# Altium PCB PCB1.PcbDoc
Units mm, origin at the board's own origin, x right, y up, seen from the top; angles counter-clockwise.
Board outline 28.19 x 24.38 mm, 2 copper layers (Top Layer, Bottom Layer), stack 1.571 mm thick; 10 components, 10 nets, 46 pads, 0 vias.
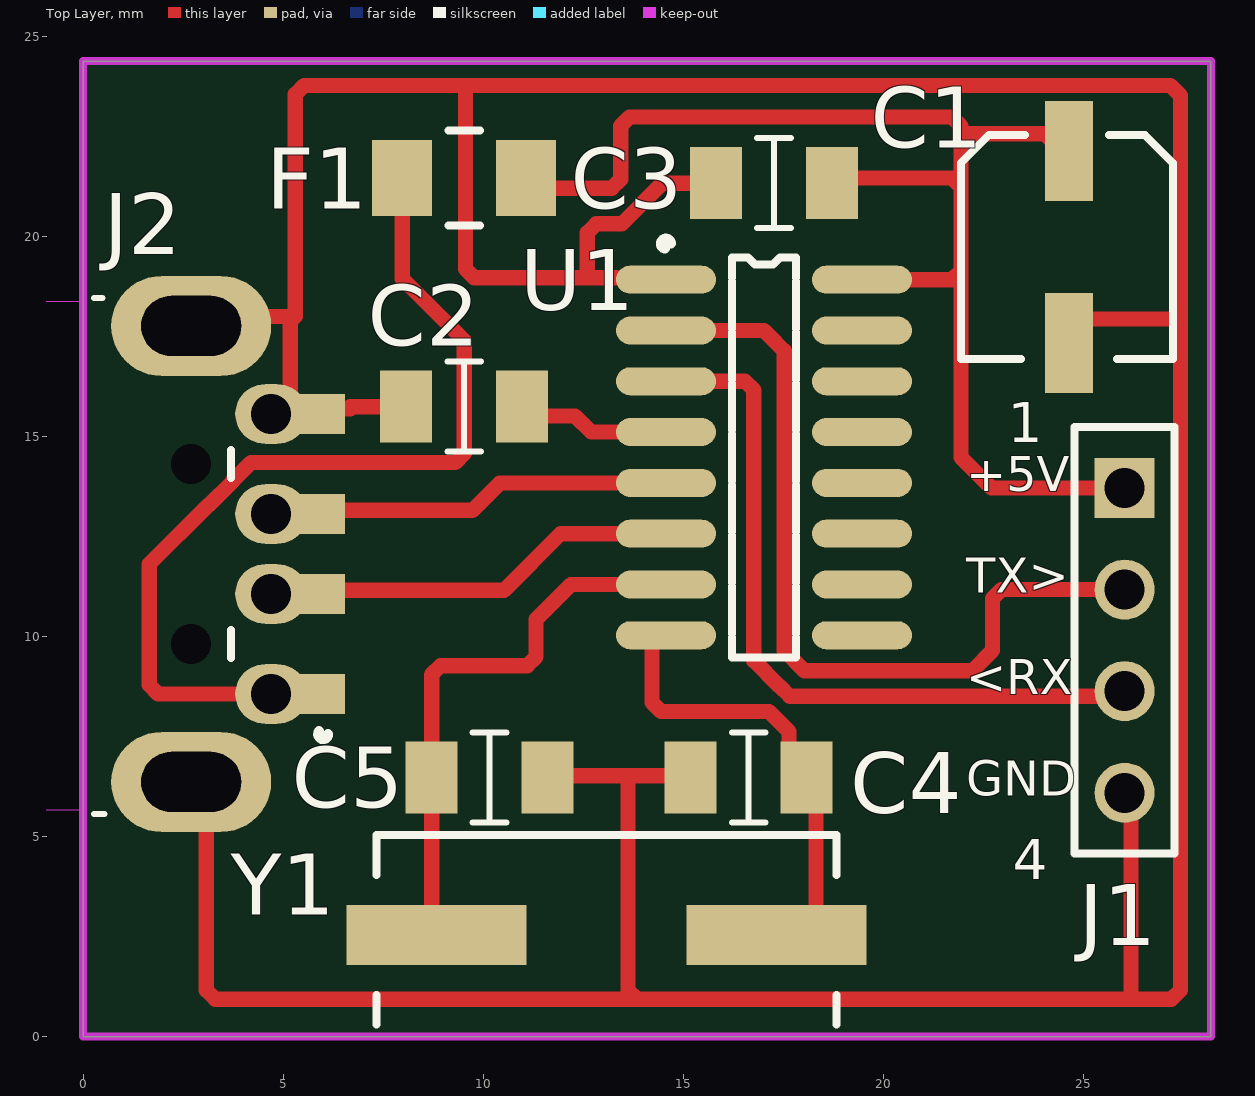
[diagram p0: Top Layer view]
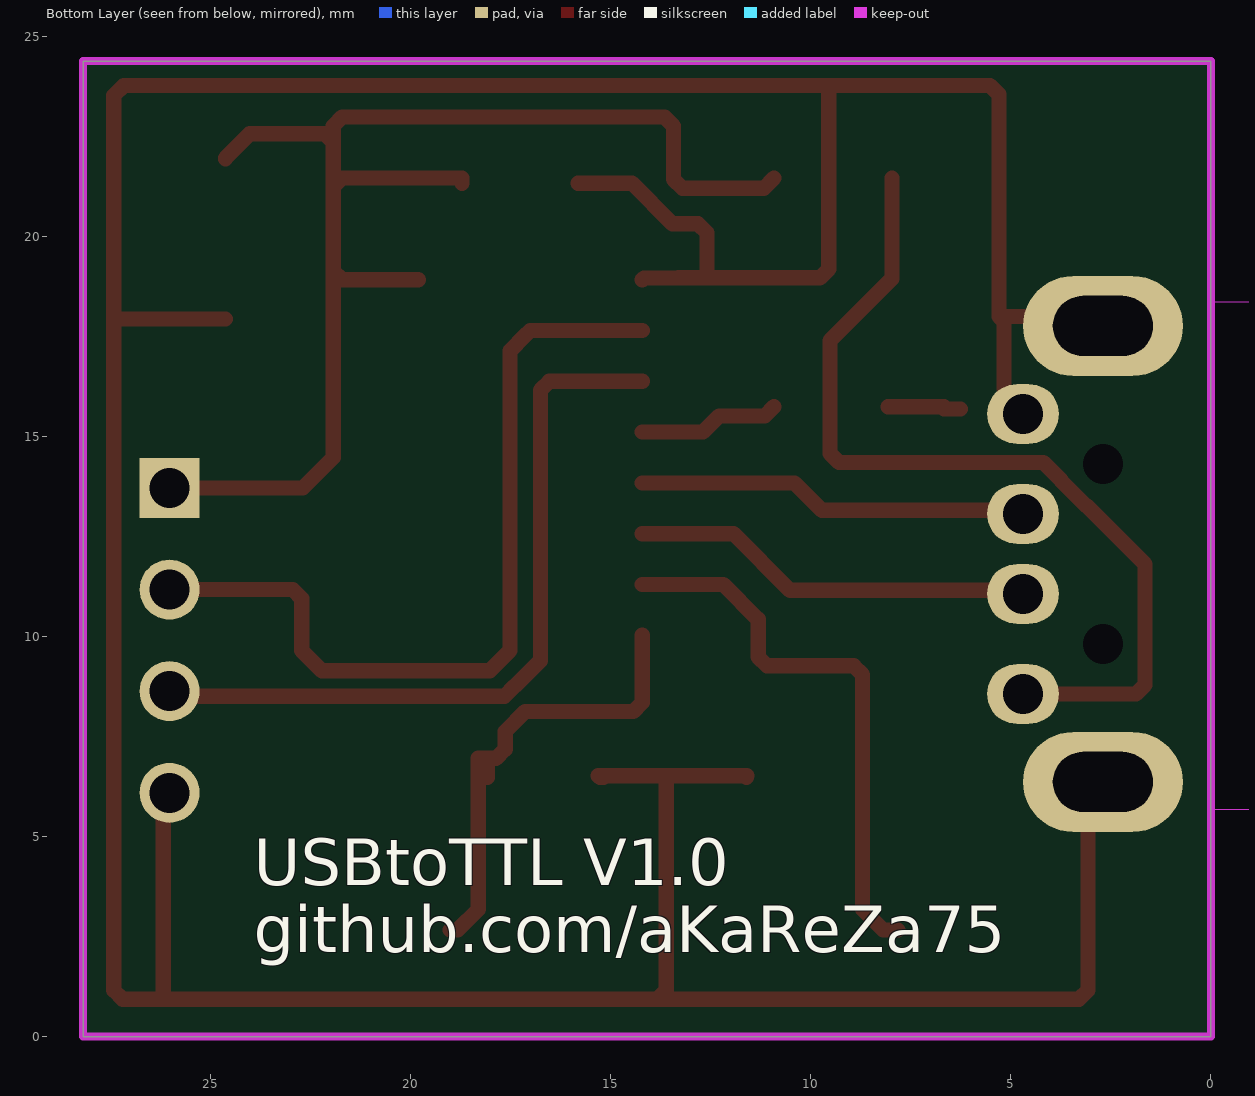
[diagram p1: Bottom Layer view, seen from below]

## Layer stack, top to bottom
Top Solder: solder mask 0.0102, Solder Resist, Dk 3.5
Top Layer: signal copper 0.0356
Dielectric 1: dielectric 1.5, FR-4, Dk 4.8
Bottom Layer: signal copper 0.0356
Bottom Solder: solder mask 0.0102, Solder Resist, Dk 3.5

## Board outline
0,0 28.194,0 28.194,24.384 0,24.384

## Design rules (kind name [scope] priority, off if disabled: settings)
AcuteAngle [All] p1: minimum=6.00000000000000E+0001 checktracksonly=TRUE
AssemblyTestPointUsage [All] p1 off:
AssemblyTestpoint [All] p1 off: testpointundercomponent=TRUE minsize=1.016 maxsize=2.54 preferedsize=1.524 minholesize=0 maxholesize=1.016 preferedholesize=0.813 testpointgrid=0.025 usegrid=TRUE gridtolerance=0 allowsidetop=TRUE allowsidebottom=TRUE
BoardOutlineClearance [All] p1: gap=0.2 ignorepadtopadclearanceinfootprint=FALSE
Clearance Poly_Clearance [All vs InPolygon] p1: gap=0.25 ignorepadtopadclearanceinfootprint=TRUE except(0.3: Arc-Hole Track-Hole SMDPad-Hole THPad-Hole Via-Hole Fill-Hole Poly-Hole Region-Hole Text-Hole)
Clearance [All] p2: gap=0.2 ignorepadtopadclearanceinfootprint=FALSE except(0.3: Arc-Hole Track-Hole SMDPad-Hole THPad-Hole Via-Hole Fill-Hole Poly-Hole Region-Hole Text-Hole)
FabricationTestPointUsage [All] p1 off: valid=0 allowmultiple=FALSE
FabricationTestpoint [All] p1 off: side=3 testpointundercomponent=TRUE minsize=1.016 maxsize=2.54 preferedsize=1.524 minholesize=0 maxholesize=1.016 preferedholesize=0.813 testpointgrid=0.025 allowsidetop=TRUE allowsidebottom=TRUE usegrid=TRUE gridtolerance=0
HoleSize [All] p1: absolutevalues=TRUE maxlimit=10 minlimit=0.4 maxpercent=80.000 minpercent=20.000
HoleToHoleClearance [All] p1: gap=0.3 allowstackedmicrovias=TRUE
MinimumAnnularRing [All] p1: minimumring=0.15
MinimumSolderMaskSliver [All] p1: minsoldermaskwidth=0.01
PolygonConnect [All] p1: thpad.connectstyle=Relief thpad.reliefconductorwidth=0.4 thpad.reliefentries=4 thpad.polygonreliefangle="90 Angle" thpad.airgapwidth=0.4 smdpad.connectstyle=Relief smdpad.reliefconductorwidth=0.4 smdpad.reliefentries=4 smdpad.polygonreliefangle="90 Angle" smdpad.airgapwidth=0.4 via.connectstyle=Direct via.reliefconductorwidth=0.254 via.reliefentries=4 via.polygonreliefangle="90 Angle" via.airgapwidth=0.254
RoutingVias [All] p1: holewidth=0.4 width=0.7 viastyle="Through Hole" minholewidth=0.4 minwidth=0.7 maxholewidth=3 maxwidth=6
SilkToSilkClearance [All] p1: silktosilkclearance=0
SilkToSolderMaskClearance [IsPad] p1: minsilkscreentomaskgap=0.01 clearancetoexposedcopper=TRUE
SolderMaskExpansion [All] p1: expansion=0.102 istentingtop=FALSE
Width [All] p1: maxlimit=10 minlimit=0.2 preferedwidth=0.3
21 further rules are at their usual default settings.

## Components (designator, comment, footprint, x,y, rotation, side; value= is the part's Value field where it differs from the comment)
C1 "10u" "CAP ALUM 5MM" 24.638,19.939 r270 top
C2 "10n" "CAP 1206/3216" 9.525,15.748 r180 top
C3 "100n" "CAP 1206/3216" 17.272,21.336 r180 top
C4 "22p" "CAP 1206/3216" 16.637,6.477 r180 top
C5 "22p" "CAP 1206/3216" 10.16,6.477 r0 top
F1 "100m" 1206_F 9.525,21.463 r0 top
J1 "4" HDR_THT_4F_2.54mm 26.035,9.906 r270 top
J2 "Type A" "USB A TYPE Right Angle" 0,12.065 r180 top
U1 "CH340G" SO16_M 17.018,14.478 r0 top
Y1 "12M" "Crystal SMD" 13.081,2.54 r180 top

## Footprints (in the part's own frame and the unit in brackets; to place one, negate y for a bottom-side part, rotate by r counter-clockwise, add the part's x,y. Pads: shape width x height; smd on the part's side, far side on the other; paste and mask are expansions set on the pad)
1206_F [mm] "Surface mount FUSE 1206"
  rect 1.5x1.9 smd: 1(-1.55,0) 2(1.55,0)
  silkscreen extent -0.4,-1.18 0.4,1.18, body extent -2.46,-1.28 2.46,1.28, height 0.71
"CAP 1206/3216" [mm] "Chip Capacitor, 2-Leads, Body 3.25x1.60mm, IPC Medium Density"
  rect 1.3x1.8 smd: 1(-1.45,0) 2(1.45,0)
  silkscreen extent -0.42,-1.12 0.42,1.12, body extent -2.37,-1.2 2.38,1.2, height 1.6
"CAP ALUM 5MM" [mm] "Aluminum Electrolytic Capacitor, Body 6.60x6.60x7.70mm, IPC Low Density"
  rect 2.5x1.2 smd: 1(-2.2,0) 2(2.6,0)
  silkscreen extent -2.6,-2.7 3,2.6, body extent -5.32,-3.92 5.33,3.93, height 7.7
"Crystal SMD" [mm] "DESIGNER ABBAS BASEREH"
  rect 4.5x1.5 smd: 1(-4.25,0) 2(4.25,0)
  silkscreen extent -5.75,-2.5 5.75,2.24, body extent -6.9,-2.8 6.9,2.8, height 4
HDR_THT_4F_2.54mm [mm] "Socket Header, Pitch 2.54 mm, THT, Vertical, single row, 4p"
  rect 1.5x1.5 hole 1: 1(-3.81,0)
  round 1.5 hole 1: 2(-1.27,0) 3(1.27,0) 4(3.81,0)
  silkscreen extent -5.33,-1.25 5.33,1.25, body extent -5.58,-1.5 5.58,1.5, height 8.5
SO16_M [mm] "16-Pin Small Outline Integrated Circuit 1.27 mm Pitch, IPC Low Density - DESIGNER ABBAS BASEREH"
  oval 2.5x0.7 smd: 1(-2.45,4.445) 2(-2.45,3.175) 3(-2.45,1.905) 4(-2.45,0.635) 5(-2.45,-0.635) 6(-2.45,-1.905) 7(-2.45,-3.175) 8(-2.45,-4.445) 9(2.45,-4.445) 10(2.45,-3.175) 11(2.45,-1.905) 12(2.45,-0.635) 13(2.45,0.635) 14(2.45,1.905) 15(2.45,3.175) 16(2.45,4.445)
  silkscreen extent -2.57,-5 0.8,5.47, body extent -4.25,-5.55 4.25,5.6, height 1.75
"USB A TYPE Right Angle" [mm] "Connector; USB1.1, Type A, SM; 4 Position; Right Angle DESIGNER ABBAS BASEREH"
  rect 2.5x1 smd: 1(-5.3,3.5) 2(-5.3,1) 3(-5.3,-1) 4(-5.3,-3.5)
  oval 1.8x1.5 hole 1: 1(-4.7,3.5) 2(-4.7,1) 3(-4.7,-1) 4(-4.7,-3.5)
  oval 4x2.5 hole 1.5 slot 2.5 at 0 deg: 5(-2.7,-5.7) 6(-2.7,5.7)
  round 0.8 hole 1 unplated: MH1(-2.7,-2.25) MH2(-2.7,2.25)
  Keep-Out Layer board cut-out: 0,6.4 0,-6.3 15.3,-6.3 15.3,6.4
  silkscreen extent -6.13,-6.4 -0.28,6.5, body extent -7.1,-7.1 15.6,7.1, height 4.5

## Part data
C1: library part Cap_Elec_10u_25_SMD, "Electrolit Capacitor SMD", Package=Package?, Rating=6.3V, Inflow=5220, Type=Electrolit, Validation=Valid
C2 C4 C5: library part Cap_Multi_SMD_1206, "Bipolar ceramic capacitor SMD", Package=1206, Rating=Rating?, Inflow=inflow?, Type=MultiLayer, Validation=Valid
C3: library part Cap_Multi_SMD_100nF_1206, "Bipolar ceramic capacitor SMD", Package=1206, Rating=50V, Inflow=inflow?, Type=MultiLayer, Validation=Valid
F1: library part Other_Elec_Fuse_SMD, "Short circiut  protection", Package=1206, Rating=Rating?, Inflow=inflow?, Type=Fast, Validation=Valid
J1: library part Con_FPH_4x1_V_THT_2.54, "Header, single row, 4 pin", Package=Package?, Rating=Rating?, Inflow=8101, Type=Type?, Validation=NT
J2: library part Con_USB2_A, "USB Connector-A Type", Package=Package?, Rating=Rating?, Inflow=6160, Type=Type?, Validation=NT
U1: library part IC_Converter_CH340G, "TTL To USB Chip", Package=SO-16, Rating=Rating?, Inflow=inflow?, Type="USB to TTL", Validation=Valid
Y1: library part Other_Elec_Xtal_SMD, "Crystal Oscillator", Package=SMD, Rating=Rating?, Inflow=inflow?, Type=Quartz, Validation=Valid

## Nets (pads, with @x,y where several pads share a name; then routed paths per layer and width w, separated by ;. In a path a pad name is that pad's centre, name@x,y a point inside that pad or via, vN(x,y) a via of type N, cw(c..) or ccw(c..) an arc to the next point about the centre after c; other vN are vias at no path point)
+5: C1.1 C3.1 F1.2 J1.1 U1.16 | length 34.1
  Top Layer w0.381: F1.2@10.925,21.463 11.179,21.209 13.212,21.209 13.435,21.432 13.435,22.764 13.658,22.987 21.721,22.987 21.944,22.764 21.944,22.351 ; C3.1 18.722,21.463 21.721,21.463 21.944,21.24 ; U1.16@19.818,18.923 21.721,18.923 21.944,19.146 ; C1.1@24.638,21.939 24.638,21.965 24.028,22.574 22.167,22.574 21.944,22.351 ; J1.1 22.706,13.716 21.944,14.478 21.944,19.146 ; 21.944,19.146 21.944,21.24 ; 21.944,21.24 21.944,22.351
GND: C1.2 C2.2 C3.2 C4.2 C5.2 J1.4 J2.4 J2.5 J2.6 U1.1 | length 119.2
  Top Layer w0.381: J2.6 3.078,5.987 3.078,1.158 3.301,0.935 13.844,0.935 ; J2.5 2.935,18 5.3,18 ; J2.4@5.3,15.565 5.064,15.801 5.064,16.082 5.176,16.193 5.176,17.876 5.3,18 ; J2.4@6.265,15.692 6.674,15.692 6.674,15.748 C2.2 ; C5.2 11.61,6.519 11.606,6.523 13.621,6.523 ; U1.1@14.218,18.923 14.176,18.965 13.321,18.965 13.317,18.969 12.603,18.969 ; C4.2 15.275,6.477 15.321,6.523 13.621,6.523 ; C3.2 14.478,21.336 13.462,20.32 12.826,20.32 12.603,20.097 12.603,18.969 ; C1.2@24.638,17.939 27.432,17.939 ; J1.4 26.192,5.939 26.192,0.935 ; 5.3,18 5.3,23.556 5.523,23.78 9.586,23.78 ; 9.586,23.78 9.555,23.749 9.555,19.192 9.778,18.969 12.603,18.969 ; 9.586,23.78 27.178,23.78 27.432,23.526 27.432,17.939 ; 13.621,6.523 13.621,1.158 13.844,0.935 ; 13.844,0.935 26.192,0.935 ; 26.192,0.935 27.209,0.935 27.432,1.158 27.432,17.939
NetC2_1: C2.1 U1.4 | length 3.6
  Top Layer w0.381: C2.1@10.925,15.748 11.157,15.516 12.297,15.516 12.7,15.113 U1.4@14.218,15.113
NetC4_1: C4.1 U1.8 Y1.1 | length 11.8
  Top Layer w0.381: U1.8@14.218,10.033 14.218,8.351 14.441,8.128 17.145,8.128 17.643,7.63 17.643,7.187 17.873,6.956 C4.1@18.087,6.956 ; C4.1 C4.1@18.087,6.956 ; Y1.1@19.024,2.667 18.833,2.667 18.317,3.184 18.317,6.956 C4.1@18.087,6.956
NetC5_1: C5.1 U1.7 Y1.2 | length 14
  Top Layer w0.381: Y1.2@7.824,2.667 8.193,2.667 8.71,3.184 C5.1 8.71,9.048 8.933,9.271 11.098,9.271 11.321,9.494 11.321,10.432 12.192,11.303 U1.7@14.218,11.303
NetF1_1: F1.1 J2.1 | length 22.7
  Top Layer w0.381: J2.1@4.7,8.565 1.874,8.565 1.651,8.788 1.651,11.811 3.114,13.274 3.131,13.274 3.741,13.884 3.741,13.901 4.191,14.351 9.302,14.351 9.525,14.574 9.525,17.399 7.975,18.949 F1.1
NetJ2_2: J2.2 U1.6 | length 10.1
  Top Layer w0.381: J2.2@4.7,11.065 4.791,11.156 10.521,11.156 11.938,12.573 U1.6@14.218,12.573
NetJ2_3: J2.3 U1.5 | length 9.8
  Top Layer w0.381: J2.3@4.7,13.065 4.791,13.156 9.727,13.156 10.414,13.843 U1.5@14.218,13.843
RX: J1.3 U1.3 | length 19.1
  Top Layer w0.381: U1.3@14.218,16.383 16.541,16.383 16.764,16.16 16.764,9.398 17.399,8.763 17.408,8.763 17.662,8.509 25.908,8.509 J1.3
TX: J1.2 U1.2 | length 21.3
  Top Layer w0.381: U1.2@14.218,17.653 17.018,17.653 17.145,17.526 17.526,17.145 17.526,9.652 18.034,9.144 22.225,9.144 22.733,9.652 22.733,10.953 22.956,11.176 J1.2
pads on no net: J2.MH1 J2.MH2 U1.9 U1.10 U1.11 U1.12 U1.13 U1.14 U1.15

## Keep-outs
Keep-Out Layer:
  lines w0.2: 0,0 0,5.665 0,18.365 0,24.384 28.194,24.384 28.194,0 0,0

## Silkscreen, mask and mechanical layers (free items; w line width, h text height)
Top Overlay:
  text "+5V" at 22.071,13.35 h1.5
  text "TX>" at 22.071,10.812 h1.5
  text "<RX" at 22.071,8.272 h1.5
  text "GND" at 22.071,5.739 h1.5
Bottom Overlay:
  text "USBtoTTL V1.0" at 23.93,3.397 h2
  text "github.com/aKaReZa75" at 23.93,1.719 h2

## Text inside footprints (layer, text, board x,y; h text height)
J1: Top Overlay "1" at 23.114,14.859 h1
J2: Mechanical 1 "PCB Edge" at -0.473,17.238 h0.25 r270